# EAGLE board PCB v28 (EAGLE 9.7.0)
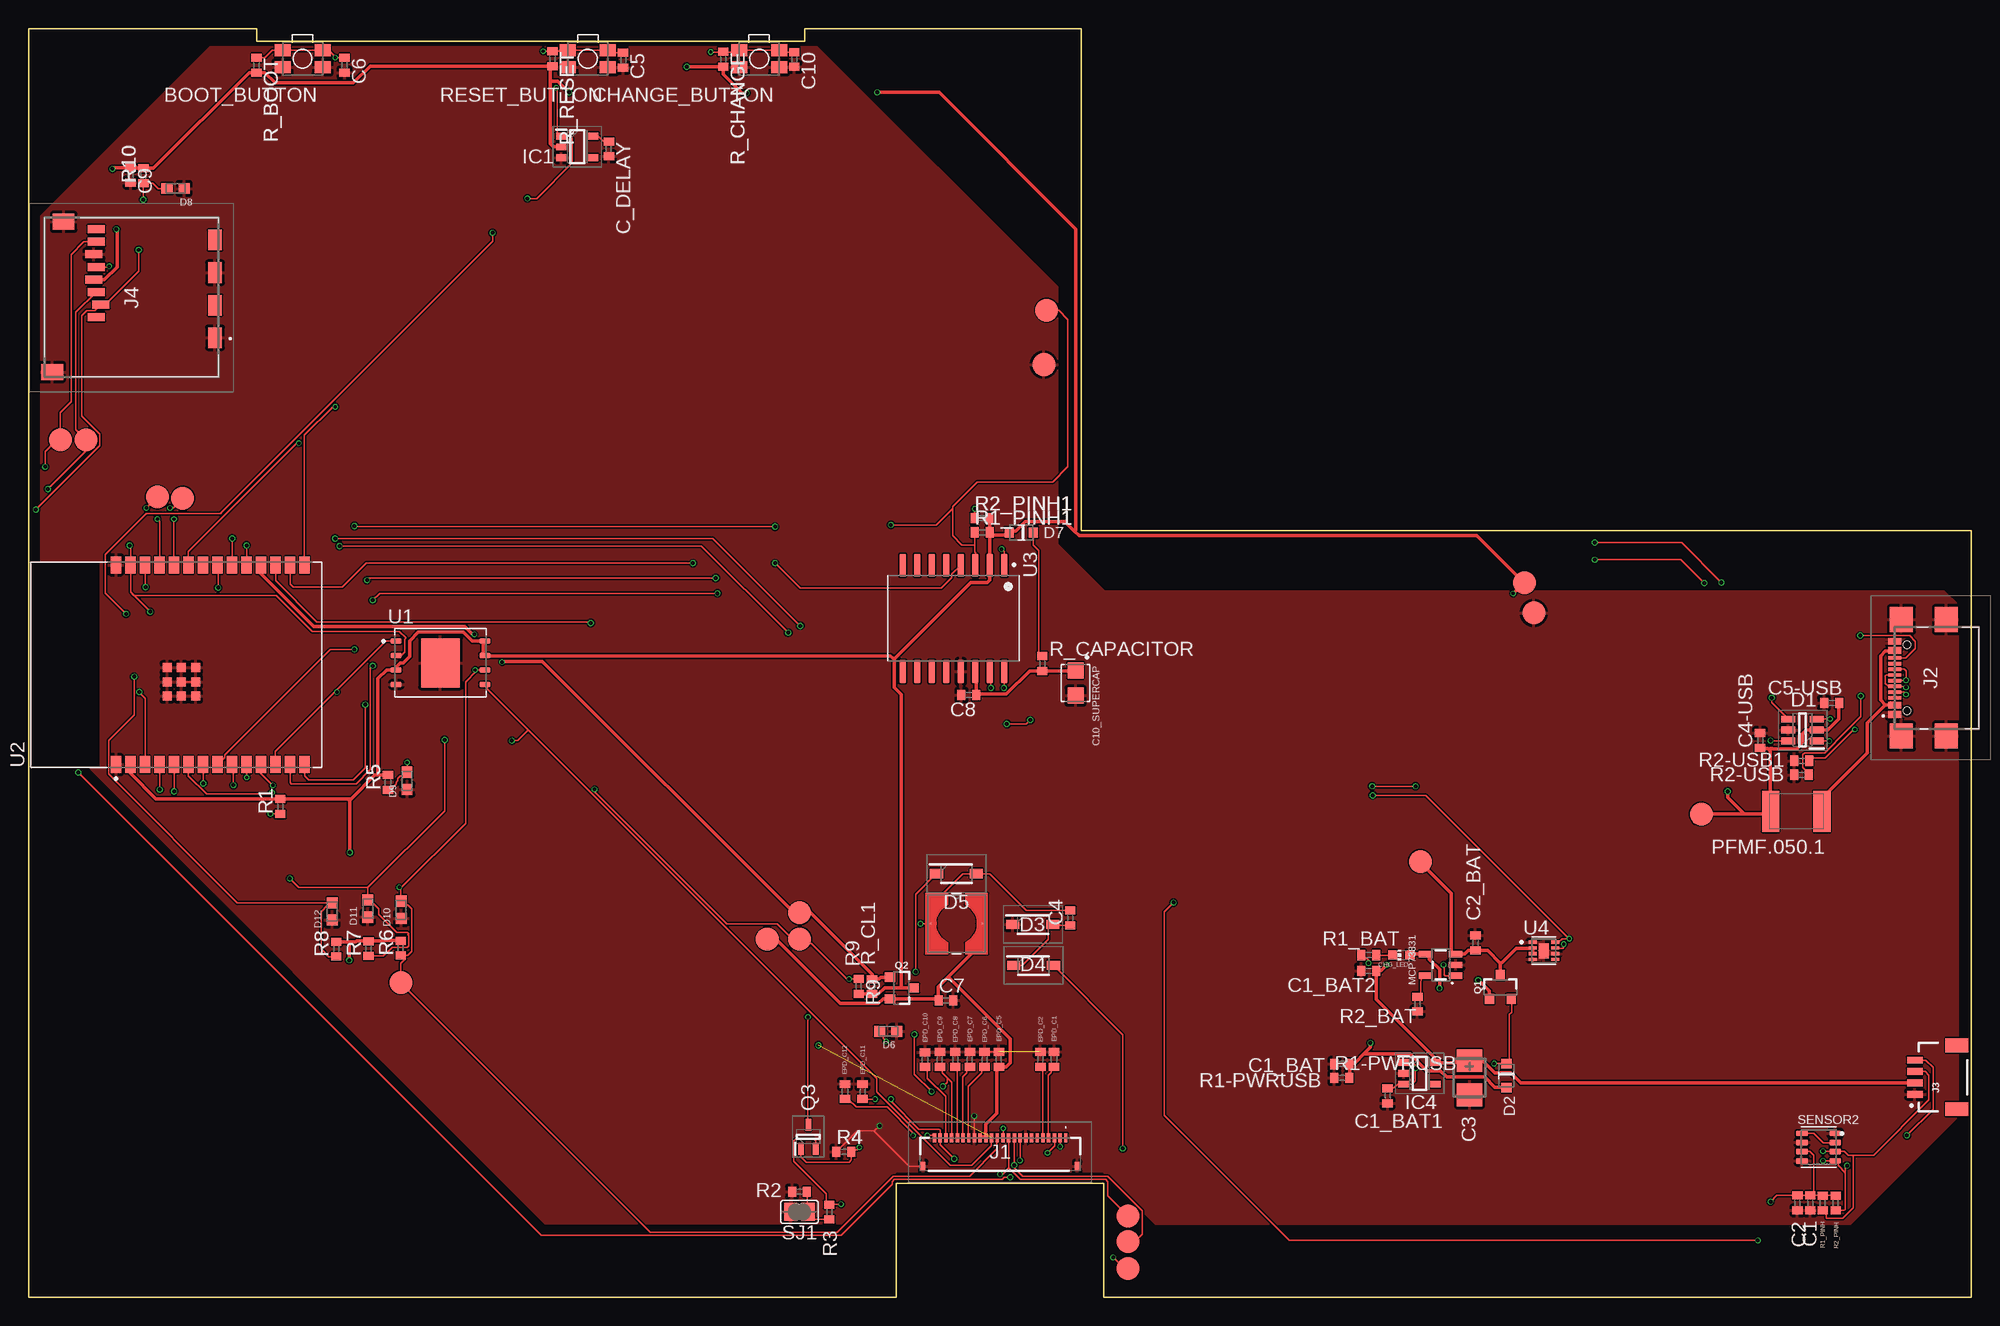
[diagram p0: board, top side]
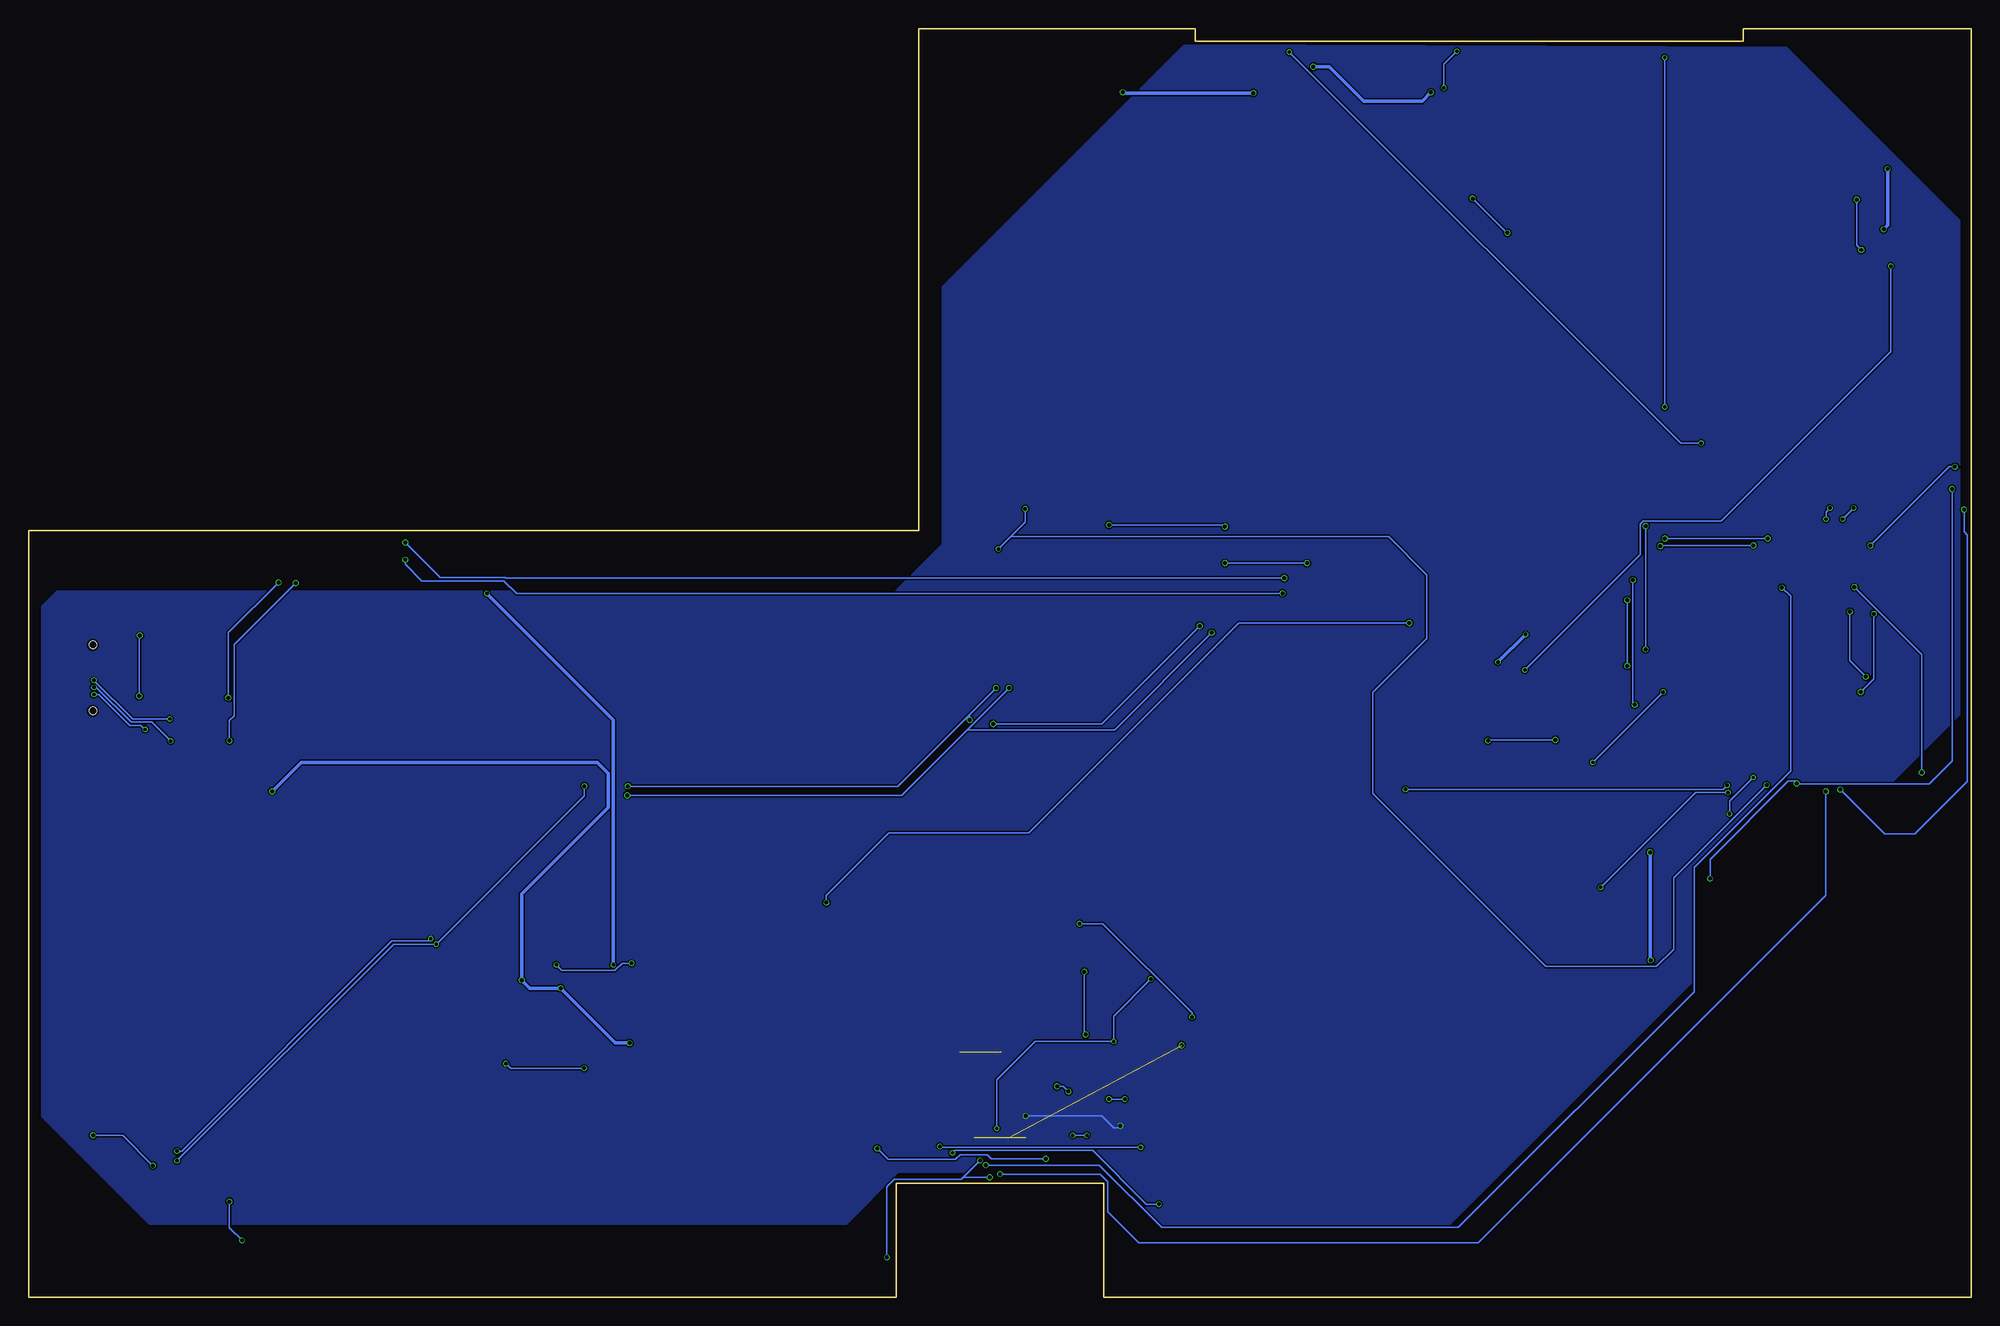
[diagram p1: board, bottom side, seen from below]

Size 170.2 x 111.2 mm. Coordinates in mm from the lower left corner, seen from the top.
Outline: 0,0 0,111.2 20,111.2 20,110.1 68,110.1 68,111.2 92.2,111.2 92.2,67.2 170.2,67.2 170.2,0 94.2,0 94.2,10 76,10 76,0 0,0
Copper layers (1*16): Top 0.035mm / dielectric 1.6mm / Bottom 0.035mm
Design rules "jlcpcb-2layers.dru *": minimum track width 0.15mm, minimum drill 0.3mm, track to track 5mil, track to pad 5mil, pad to pad 5mil, via to via 5mil, smd to smd 5mil, copper to edge 0.2mm, drill to drill 6mil, minimum pad ring 10mil, minimum via ring 3mil, stop-mask expansion 4mil, vias tented up to drill 0mil, thermal gap 10mil
Net classes: 1 Power lines: width 0.3 mm

## Footprints (pad centres in the part's own frame; a part is rotated, then mirrored left to right if it is on the bottom)
MYBUTTON = smd 1.4 x 1.05: 1 1.75,0.75; 2 -1.75,0.75; 3 -1.75,-0.75; 4 1.75,-0.75
EAGLE-LTSPICE_C0402 = smd 0.7 x 0.9: 1 -0.65,0; 2 0.65,0
ESP32_WROVER_EAGLE-LTSPICE_C0402 = smd 0.7 x 0.9: 1 -0.65,0; 2 0.65,0
RCL_CT3528 = smd 2 x 2.2: + -1.5,0; - 1.5,0
CAPCP3225X100N = smd 1.4 x 1.4: 1 -1.1,0; 2 1.1,0
ADAFRUIT_CHIP-LED0603 = smd 0.8 x 0.8: A 0,-0.75; C 0,0.75
SOT95P280X145-6N = smd 1.2 x 0.6: 1 -1.25,0.95; 2 -1.25,0; 3 -1.25,-0.95; 4 1.25,-0.95; 5 1.25,0; 6 1.25,0.95
ESP32_WROVER_AVX---SD0805S020S1R0_AVX_SD0805S020S1R0_0 = smd 0.8 x 0.9: 1 -1.05,0; 2 1.05,0
SOD3716X135N = smd 1.15 x 0.8: 1 -1.75,0; 2 1.75,0
DIOC1608X36N = smd 0.97 x 0.94: 1 -0.75,0; 2 0.75,0
SOT95P280X125-5N = smd 0.9 x 0.6: 1 -1.4,0.95; 2 -1.4,0; 3 -1.4,-0.95; 4 1.4,-0.95; 5 1.4,0.95
SOT95P280X120-5N = smd 0.9 x 0.6: 1 -1.4,0.95; 2 -1.4,0; 3 -1.4,-0.95; 4 1.4,-0.95; 5 1.4,0.95
FH34SRJ24S05SH99 = smd 0.3 x 0.8: 1 5.75,1.45; 2 5.25,1.45; 3 4.75,1.45; 4 4.25,1.45; 5 3.75,1.45; 6 3.25,1.45; 7 2.75,1.45; 8 2.25,1.45; 9 1.75,1.45; 10 1.25,1.45; 11 0.75,1.45; 12 0.25,1.45; 13 -0.25,1.45; 14 -0.75,1.45; 15 -1.25,1.45; 16 -1.75,1.45; 17 -2.25,1.45; 18 -2.75,1.45; 19 -3.25,1.45; 20 -3.75,1.45; 21 -4.25,1.45; 22 -4.75,1.45; 23 -5.25,1.45; 24 -5.75,1.45 | smd 0.4 x 0.8: MP1 6.75,-1.05; MP2 -6.75,-1.05
SAMACSYS_PARTS_USB4110GFA = smd 0.3 x 1.15: A1 -3.35,3.678; A4 -2.55,3.678; A5 -1.25,3.678; A6 -0.25,3.678; A7 0.25,3.678; A8 1.25,3.678; A9 2.55,3.678; A12 3.35,3.678; B1 3.05,3.678; B4 2.25,3.678; B5 1.75,3.678; B6 0.75,3.678; B7 -0.75,3.678; B8 -1.75,3.678; B9 -2.25,3.678; B12 -3.05,3.678 | smd 2.18 x 2: MP1 -5.11,-0.827; MP2 5.11,-0.827; MP3 -5.11,3.103; MP4 5.11,3.103 | hole 0.65: -2.89,2.603; 2.89,2.603
JST04_1MM_RA = smd 0.6 x 1.35: 1 -1.5,0; 2 -0.5,0; 3 0.5,0; 4 1.5,0 | smd 1.2 x 2: NC1 2.8,-3.675; NC2 -2.8,-3.675
112ATAARR03ATTEND = smd 1.8 x 1.2: G1 10.6,10.4; G2 4.9,10.4; S1 7.75,10.4; S2 2.05,10.4 | smd 1.4 x 1.9: G3 13.6,-3.85; G4 0.45,-2.85 | smd 0.7 x 1.5: P1 8.8,0; P2 7.7,0.4; P3 6.6,0; P4 5.5,-0.2; P5 4.4,0; P6 3.3,-0.2; P7 2.2,0; P8 1.1,0
IND_4828-WE-TPC_WRE = smd 0.127 x 0.127: 1 -2.286,0; 2 2.286,0
ESP32_WROVER_SPARKFUN-IC-POWER_SOT23-5 = smd 0.55 x 1.2: 1 -0.95,-1.3; 2 0,-1.3; 3 0.95,-1.3; 4 0.95,1.3; 5 -0.95,1.3
ESP32C6_VARISTOR_CT/CN1812 = smd 1.5 x 3.6: 1 -2.25,0; 2 2.25,0
ESP32_WROVER_SPARKFUN-DISCRETESEMI_SOT23-3 = smd 0.8 x 0.9: 1 -0.95,-1; 2 0.95,-1; 3 0,1.1
SOT65P210X110-3N = smd 1.05 x 0.5: 1 -1.05,0.65; 2 -1.05,-0.65; 3 1.05,0
ESP32_WROVER_EAGLE-LTSPICE_R0402 = smd 0.7 x 0.9: 1 -0.65,0; 2 0.65,0
ESP32_WROVER_BME680_PSON80P300X300X100-8N = smd 1.016 x 0.5: 1 1.458,1.2; 2 1.458,0.4; 3 1.458,-0.4; 4 1.458,-1.2; 5 -1.458,-1.22; 6 -1.458,-0.4; 7 -1.458,0.4; 8 -1.458,1.2
SJ = smd 1.168 x 1.6: 1 -0.762,0; 2 0.762,0
TP20R = smd 2 x 2: TP 0,0
SON127P600X800X80-9N = smd 0.94 x 0.44: 1 -3.895,1.905; 2 -3.895,0.635; 3 -3.895,-0.635; 4 -3.895,-1.905; 5 3.895,-1.905; 6 3.895,-0.635; 7 3.895,0.635; 8 3.895,1.905 | smd 3.4 x 4.3: 9 0,0
XCVR_ESP32-C6-WROOM-1-N8 = smd 1.5 x 0.9: 1 -8.75,5.26; 2 -8.75,3.99; 3 -8.75,2.72; 4 -8.75,1.45; 5 -8.75,0.18; 6 -8.75,-1.09; 7 -8.75,-2.36; 8 -8.75,-3.63; 9 -8.75,-4.9; 10 -8.75,-6.17; 11 -8.75,-7.44; 12 -8.75,-8.71; 13 -8.75,-9.98; 14 -8.75,-11.25; 15 8.75,-11.25; 16 8.75,-9.98; 17 8.75,-8.71; 18 8.75,-7.44; 19 8.75,-6.17; 20 8.75,-4.9; 21 8.75,-3.63; 22 8.75,-2.36; 23 8.75,-1.09; 24 8.75,0.18; 25 8.75,1.45; 26 8.75,2.72; 27 8.75,3.99; 28 8.75,5.26 | smd 0.8 x 0.8: 29_1 -2.755,0.79; 29_2 -1.505,0.79; 29_3 -0.255,0.79; 29_4 -2.755,-0.46; 29_5 -1.505,-0.46; 29_6 -0.255,-0.46; 29_7 -2.755,-1.71; 29_8 -1.505,-1.71; 29_9 -0.255,-1.71
SOIC127P1032X265-16N = smd 2.05 x 0.59: 1 -4.655,4.445; 2 -4.655,3.175; 3 -4.655,1.905; 4 -4.655,0.635; 5 -4.655,-0.635; 6 -4.655,-1.905; 7 -4.655,-3.175; 8 -4.655,-4.445; 9 4.655,-4.445; 10 4.655,-3.175; 11 4.655,-1.905; 12 4.655,-0.635; 13 4.655,0.635; 14 4.655,1.905; 15 4.655,3.175; 16 4.655,4.445
SON50P200X200X80-9N = smd 0.76 x 0.27: 1 -0.985,0.75; 2 -0.985,0.25; 3 -0.985,-0.25; 4 -0.985,-0.75; 5 0.985,-0.75; 6 0.985,-0.25; 7 0.985,0.25; 8 0.985,0.75 | smd 0.9 x 1.3: 9 0,0

## Placement (x,y rotation side)
BOOT_BUTTON  BUTTON_CUSYOMV1  [MYBUTTON]  24,108.55 180 top
C1  100nF  [EAGLE-LTSPICE_C0402]  156.07,8.29 270 top
C1_BAT  4.7uF  [EAGLE-LTSPICE_C0402]  115.04,20.46 180 top
C1_BAT1  4.7uF  [ESP32_WROVER_EAGLE-LTSPICE_C0402]  119.05,17.68 270 top
C1_BAT2  4.7uF  [ESP32_WROVER_EAGLE-LTSPICE_C0402]  117.39,28.63 180 top
C2  100nF  [EAGLE-LTSPICE_C0402]  154.95,8.29 270 top
C2_BAT  4.7uF  [EAGLE-LTSPICE_C0402]  126.75,31.06 90 top
C3  100uF TANT  [RCL_CT3528]  126.23,19.26 270 top
C4  4.7uF/25V  [EAGLE-LTSPICE_C0402]  91.26,33.25 90 top
C4-USB  100nF  [ESP32_WROVER_EAGLE-LTSPICE_C0402]  151.68,48.81 90 top
C5  1uF  [EAGLE-LTSPICE_C0402]  52.08,108.42 270 top
C5-USB  4.7uF  [ESP32_WROVER_EAGLE-LTSPICE_C0402]  157.95,52.09 180 top
C6  100nF  [EAGLE-LTSPICE_C0402]  27.68,107.99 270 top
C7  10uF  [EAGLE-LTSPICE_C0402]  80.37,26.04 0 top
C8  100nF  [EAGLE-LTSPICE_C0402]  82.36,52.79 180 top
C9  100nF  [EAGLE-LTSPICE_C0402]  8.94,98.34 270 top
C10  100nF  [EAGLE-LTSPICE_C0402]  67.07,108.49 270 top
C10_SUPERCAP  CPH3225A  [CAPCP3225X100N]  91.73,53.85 270 top
C_DELAY  100nF  [EAGLE-LTSPICE_C0402]  50.84,100.65 270 top
CHANGE_BUTTON  BUTTON_CUSYOMV1  [MYBUTTON]  64,108.55 180 top
CHG_LED  [ADAFRUIT_CHIP-LED0603]  120.26,30.01 90 top
D1  USBLC6-2SC6Y  [SOT95P280X145-6N]  155.4,49.73 180 top
D2  ESP32_WROVER_AVX---SD0805S020S1R0_AVX_SD0805S020S1R0_0_0AVX_SD0805S020S1R0_0_0  [ESP32_WROVER_AVX---SD0805S020S1R0_AVX_SD0805S020S1R0_0]  129.46,19.44 270 top
D3  MBR0530  [SOD3716X135N]  87.98,32.68 0 top
D4  MBR0530  [SOD3716X135N]  88.04,29.09 0 top
D5  MBR0530  [SOD3716X135N]  81.28,37.14 0 top
D6  PGB1010603MR  [DIOC1608X36N]  75.3,23.33 180 top
D7  ESP32_WROVER_AVX---SD0805S020S1R0_AVX_SD0805S020S1R0_0_0AVX_SD0805S020S1R0_0_0  [ESP32_WROVER_AVX---SD0805S020S1R0_AVX_SD0805S020S1R0_0]  86.96,67.04 180 top
D8  PGB1010603MR  [DIOC1608X36N]  12.88,97.18 180 top
D9  PGB1010603MR  [DIOC1608X36N]  33.16,45.28 90 top
D10  PGB1010603MR  [DIOC1608X36N]  32.64,33.98 90 top
D11  PGB1010603MR  [DIOC1608X36N]  29.72,34.08 90 top
D12  PGB1010603MR  [DIOC1608X36N]  26.6,33.83 90 top
EPD_C1  1uF/50V  [EAGLE-LTSPICE_C0402]  89.83,20.88 90 top
EPD_C2  1uF/50V  [EAGLE-LTSPICE_C0402]  88.64,20.88 90 top
EPD_C5  1uF/50V  [EAGLE-LTSPICE_C0402]  85,20.88 90 top
EPD_C6  1uF/50V  [EAGLE-LTSPICE_C0402]  83.75,20.86 90 top
EPD_C7  1uF/50V  [EAGLE-LTSPICE_C0402]  82.46,20.86 90 top
EPD_C8  1uF/50V  [EAGLE-LTSPICE_C0402]  81.17,20.86 90 top
EPD_C9  1uF/50V  [EAGLE-LTSPICE_C0402]  79.83,20.86 90 top
EPD_C10  1uF/50V  [EAGLE-LTSPICE_C0402]  78.53,20.85 90 top
EPD_C11  1uF/50V  [EAGLE-LTSPICE_C0402]  73.06,18.05 90 top
EPD_C12  1uF/50V  [EAGLE-LTSPICE_C0402]  71.52,18.05 90 top
IC1  BD5229G-TR  [SOT95P280X125-5N]  48.07,100.83 0 top
IC4  XC6220A331MR-G  [SOT95P280X120-5N]  121.85,19.65 0 top
J1  FH34SRJ-24S-0.5SH_99_  [FH34SRJ24S05SH99]  85.11,12.55 0 top
J2  SAMACSYS_PARTS_USB4110-GF-A  [SAMACSYS_PARTS_USB4110GFA]  167.16,54.3 90 top
J3  QWIIC_RIGHT_ANGLE  [JST04_1MM_RA]  165.25,19.3 90 top
J4  112A-TAAR-R03_ATTEND  [112ATAARR03ATTEND]  5.93,94.71 270 top
L1  68uH  [IND_4828-WE-TPC_WRE]  81.29,32.76 0 top
MCP73831  ESP32_WROVER_SPARKFUN-IC-POWER_MCP73831  [ESP32_WROVER_SPARKFUN-IC-POWER_SOT23-5]  123.7,29.15 90 top
PFMF.050.1  ESP32C6_VARISTORCN1812  [ESP32C6_VARISTOR_CT/CN1812]  154.86,42.61 180 top
Q1  20V/4.2A/52mΩ/1.4W  [ESP32_WROVER_SPARKFUN-DISCRETESEMI_SOT23-3]  128.93,27.17 0 top
Q2  20V/4.2A/52mΩ/1.4W  [ESP32_WROVER_SPARKFUN-DISCRETESEMI_SOT23-3]  76.45,27.12 270 top
Q3  SI1308EDL-T1-GE3  [SOT65P210X110-3N]  68.31,14.09 90 top
R1  10k  [ESP32_WROVER_EAGLE-LTSPICE_R0402]  22.05,43.02 90 top
R1-PWRUSB  100k  [ESP32_WROVER_EAGLE-LTSPICE_R0402]  115.04,19.25 0 top
R1_BAT  200  [ESP32_WROVER_EAGLE-LTSPICE_R0402]  117.41,30.01 180 top
R1_PINH  10k  [ESP32_WROVER_EAGLE-LTSPICE_R0402]  157.18,8.28 270 top
R1_PINH1  10k  [ESP32_WROVER_EAGLE-LTSPICE_R0402]  83.53,67.05 0 top
R2  2.2  [ESP32_WROVER_EAGLE-LTSPICE_R0402]  67.54,9.27 0 top
R2-USB  5k1  [ESP32_WROVER_EAGLE-LTSPICE_R0402]  155.31,45.8 180 top
R2-USB1  5k1  [ESP32_WROVER_EAGLE-LTSPICE_R0402]  155.32,47.03 0 top
R2_BAT  2k  [ESP32_WROVER_EAGLE-LTSPICE_R0402]  121.67,25.71 90 top
R2_PINH  10k  [ESP32_WROVER_EAGLE-LTSPICE_R0402]  158.31,8.28 270 top
R2_PINH1  10k  [ESP32_WROVER_EAGLE-LTSPICE_R0402]  83.52,68.3 0 top
R3  0.47  [ESP32_WROVER_EAGLE-LTSPICE_R0402]  70.14,7.49 90 top
R4  10k  [ESP32_WROVER_EAGLE-LTSPICE_R0402]  71.42,12.77 0 top
R5  10k  [ESP32_WROVER_EAGLE-LTSPICE_R0402]  31.49,45.12 90 top
R6  10k  [ESP32_WROVER_EAGLE-LTSPICE_R0402]  32.61,30.62 90 top
R7  10k  [ESP32_WROVER_EAGLE-LTSPICE_R0402]  29.78,30.57 90 top
R8  10k  [ESP32_WROVER_EAGLE-LTSPICE_R0402]  26.95,30.52 90 top
R9  10k  [ESP32_WROVER_EAGLE-LTSPICE_R0402]  72.72,27.27 270 top
R10  10k  [ESP32_WROVER_EAGLE-LTSPICE_R0402]  10.06,98.32 90 top
R_BOOT  10k  [ESP32_WROVER_EAGLE-LTSPICE_R0402]  19.97,107.98 270 top
R_CAPACITOR  15  [ESP32_WROVER_EAGLE-LTSPICE_R0402]  88.79,55.55 270 top
R_CHANGE  10k  [ESP32_WROVER_EAGLE-LTSPICE_R0402]  60.86,108.5 270 top
R_CL1  10k  [ESP32_WROVER_EAGLE-LTSPICE_R0402]  73.89,27.24 270 top
R_RESET  10k  [ESP32_WROVER_EAGLE-LTSPICE_R0402]  45.9,108.55 270 top
RESET_BUTTON  BUTTON_CUSYOMV1  [MYBUTTON]  49,108.55 180 top
SENSOR2  ESP32_WROVER_BME680_BME680  [ESP32_WROVER_BME680_PSON80P300X300X100-8N]  156.81,13.18 0 top
SJ1  [SJ]  67.53,7.5 0 top
TP1  TPTP20R  [TP20R]  11.28,70.15 0 top
TP2  TPTP20R  [TP20R]  13.5,70.05 0 top
TP3  TPTP20R  [TP20R]  121.93,38.2 0 top
TP4  TPTP20R  [TP20R]  88.94,81.75 0 top
TP5  TPTP20R  [TP20R]  131.86,60 0 top
TP6  TPTP20R  [TP20R]  2.78,75.17 0 top
TP7  TPTP20R  [TP20R]  5.05,75.15 0 top
TP8  TPTP20R  [TP20R]  32.62,27.6 0 top
TP9  TPTP20R  [TP20R]  96.3,2.54 0 top
TP10  TPTP20R  [TP20R]  67.54,31.42 0 top
TP11  TPTP20R  [TP20R]  96.31,7.15 0 top
TP12  TPTP20R  [TP20R]  96.29,4.92 0 top
TP13  TPTP20R  [TP20R]  67.54,33.72 0 top
TP14  TPTP20R  [TP20R]  146.54,42.37 0 top
TP15  TPTP20R  [TP20R]  89.19,86.52 0 top
TP16  TPTP20R  [TP20R]  131.06,62.65 0 top
TP17  TPTP20R  [TP20R]  64.71,31.4 0 top
U1  W25Q512JVEIQ  [SON127P600X800X80-9N]  36.09,55.61 0 top
U2  ESP32-C6-WROOM-1-N8  [XCVR_ESP32-C6-WROOM-1-N8]  12.93,55.45 90 top
U3  DS3231SN#  [SOIC127P1032X265-16N]  81.02,59.51 270 top
U4  MAX17048G+T10  [SON50P200X200X80-9N]  132.74,30.38 0 top

## Library data of the parts
BOOT_BUTTON CHANGE_BUTTON CHG_LED PFMF.050.1 RESET_BUTTON SJ1 TP1-TP17 = DeskAssistant v19 v1
C1 C1_BAT C1_BAT1 C1_BAT2 C2 C2_BAT C4 C4-USB C5 C5-USB C6-C10 C_DELAY EPD_C1 EPD_C2 EPD_C5-EPD_C12 = DeskAssistant v19 v1; SPICEMODEL: NONE; SPICEPREFIX: C
C3 = DeskAssistant v19 v1; SPICEPREFIX: C
C10_SUPERCAP = DeskAssistant v19 v1; AVAILABILITY: Not in stock; CHECK_PRICES: https://www.snapeda.com/parts/CPH3225A/Seiko+Instruments/view-part/?ref=eda; DESCRIPTION: 11 mF (EDLC) Supercapacitor 3.3 V 1210 (3225 Metric) - -; MF: Seiko Instruments; MP: CPH3225A; PACKAGE: 1210 Seiko; PRICE: None; PURCHASE-URL: https://www.snapeda.com/api/url_track_click_mouser/?unipart_id=562593&manufacturer=Seiko Instruments&part_name=CPH3225A&search_term=None; SNAPEDA_LINK: https://www.snapeda.com/parts/CPH3225A/Seiko+Instruments/view-part/?ref=snap
D1 = DeskAssistant v19 v1; AVAILABILITY: In Stock; CHECK_PRICES: https://www.snapeda.com/parts/USBLC6-2SC6Y/STMicroelectronics/view-part/?ref=eda; DESCRIPTION: 17V Clamp 5A (8/20µs) Ipp Tvs Diode Surface Mount SOT-23-6; MF: STMicroelectronics; MP: USBLC6-2SC6Y; PACKAGE: SOT-23-6 STMicroelectronics; PRICE: None; SNAPEDA_LINK: https://www.snapeda.com/parts/USBLC6-2SC6Y/STMicroelectronics/view-part/?ref=snap
D2 D7 = DeskAssistant v19 v1; CENTROID_NOT_SPECIFIED: No; DATASHEET: http://datasheets.avx.com/schottky.pdf; DIGIKEY_DESCRIPTION: DIODE SCHOTTKY 20V 1A 0805; DIGIKEY_PART_NUMBER: 478-7800-1-ND; LEAD_FREE: yes; MF: AVX; MOUSER_PART_NUMBER: 581-SD0805S020S1R0; PACKAGE: 0805 (2012 metric); PREFIX: D; ROHS: yes; TEMPERATURE_RANGE_HIGH: +125°C; TEMPERATURE_RANGE_LOW: -55°C
D3-D5 = DeskAssistant v19 v1; AVAILABILITY: In Stock; CHECK_PRICES: https://www.snapeda.com/parts/MBR0530/Onsemi/view-part/?ref=eda; DESCRIPTION: Diode Schottky 30 V 500mA Surface Mount SOD-123; MF: ON Semiconductor; MP: MBR0530; PACKAGE: SOD-123-2 ON Semiconductor; PRICE: None; PURCHASE-URL: https://www.snapeda.com/api/url_track_click_mouser/?unipart_id=179458&manufacturer=ON Semiconductor&part_name=MBR0530&search_term=None; SNAPEDA_LINK: https://www.snapeda.com/parts/MBR0530/Onsemi/view-part/?ref=snap
D6 D8-D12 = DeskAssistant v19 v1; AVAILABILITY: In Stock; CHECK_PRICES: https://www.snapeda.com/parts/PGB1010603MR/Littelfuse/view-part/?ref=eda; DESCRIPTION: 150V (Typ) Clamp - Ipp Tvs Diode Surface Mount 0603 (1608 Metric); MF: Littelfuse Inc.; MP: PGB1010603MR; PACKAGE: 0603 Littelfuse Inc.; PRICE: None; PURCHASE-URL: https://www.snapeda.com/api/url_track_click_mouser/?unipart_id=5659453&manufacturer=Littelfuse Inc.&part_name=PGB1010603MR&search_term=None; SNAPEDA_LINK: https://www.snapeda.com/parts/PGB1010603MR/Littelfuse/view-part/?ref=snap
IC1 = DeskAssistant v19 v1; DESCRIPTION: Voltage Detector with Adjustable Delay Time: CMOS processes are utilized to develop high precision, low current consumption CMOS reset ICs that allow arbitrary setting of the delay time. The extensive lineup includes both Nch Open Drain and CMOS output types in a wide range of detection voltages (from 2.3V to 6.0V, in 0.1V steps), enabling selection of the ideal solution based on customer requirements. In addition, the entire series is of course both lead-free and RoHS-compliant.; HEIGHT: 1.25mm; MANUFACTURER_NAME: ROHM Semiconductor; MANUFACTURER_PART_NUMBER: BD5229G-TR; MOUSER_PART_NUMBER: 755-BD5229G-TR; MOUSER_PRICE-STOCK: https://www.mouser.co.uk/ProductDetail/ROHM-Semiconductor/BD5229G-TR?qs=4kLU8WoGk0vvnhrrYwdszw%3D%3D
IC4 = DeskAssistant v19 v1; DESCRIPTION: LDO Voltage Regulators; HEIGHT: 1.2mm; MANUFACTURER_NAME: Torex; MANUFACTURER_PART_NUMBER: XC6220A331MR-G; MOUSER_PART_NUMBER: 865-XC6220A331MR-G; MOUSER_PRICE-STOCK: https://www.mouser.co.uk/ProductDetail/Torex-Semiconductor/XC6220A331MR-G?qs=AsjdqWjXhJ8ZSWznL1J0gg%3D%3D
J1 = DeskAssistant v19 v1; DESCRIPTION: 24 Position FFC, FPC Connector Contacts, Top and Bottom 0.020" (0.50mm) Surface Mount, Right Angle; HEIGHT: 1.1mm; MANUFACTURER_NAME: Hirose; MANUFACTURER_PART_NUMBER: FH34SRJ-24S-0.5SH(99); MOUSER_PART_NUMBER: 798-FH34SRJ24S05SH99; MOUSER_PRICE-STOCK: https://www.mouser.co.uk/ProductDetail/Hirose-Connector/FH34SRJ-24S-0.5SH99?qs=vcbW%252B4%252BSTIpKBl5ap9J8Fw%3D%3D
J2 = DeskAssistant v19 v1; DESCRIPTION: CONN USB 2.0 TYPE-C R/A SMT; HEIGHT: 3.26mm; MANUFACTURER_NAME: GCT (GLOBAL CONNECTOR TECHNOLOGY); MANUFACTURER_PART_NUMBER: USB4110-GF-A; MOUSER_PART_NUMBER: 640-USB4110-GF-A; MOUSER_PRICE-STOCK: https://www.mouser.co.uk/ProductDetail/GCT/USB4110-GF-A?qs=KUoIvG%2F9IlYiZvIXQjyJeA%3D%3D
J3 = DeskAssistant v19 v1; PROD_ID: CONN-13694
J4 = DeskAssistant v19 v1; DESCRIPTION: Micro SD Card Socket, Push-Push Type, Top Mount, SMT, H=1.83mm, 10u; HEIGHT: 1.9mm; MANUFACTURER_NAME: ATTEND; MANUFACTURER_PART_NUMBER: 112A-TAAR-R03 ATTEND
L1 = DeskAssistant v19 v1; COPYRIGHT: Copyright (C) 2024 Ultra Librarian. All rights reserved.; MANUFACTURER_PART_NUMBER: 744043680; MFR_NAME: Wurth Electronics
MCP73831 = DeskAssistant v19 v1; PROD_ID: IC-09995
Q1 Q2 = DeskAssistant v19 v1; PROD_ID: TRAN-14388
Q3 = DeskAssistant v19 v1; AVAILABILITY: In Stock; CHECK_PRICES: https://www.snapeda.com/parts/SI1308EDL-T1-GE3/Vishay+Siliconix/view-part/?ref=eda; DESCRIPTION: Si1308EDL-T1-GE3 N-channel MOSFET Transistor, 1.5 A, 30 V, 3-Pin SC-70 | Siliconix / Vishay SI1308EDL-T1-GE3; MF: Vishay Siliconix; MP: SI1308EDL-T1-GE3; PACKAGE: SOT-323 Vishay Semiconductor; PRICE: None; PURCHASE-URL: https://www.snapeda.com/api/url_track_click_mouser/?unipart_id=274603&manufacturer=Vishay Siliconix&part_name=SI1308EDL-T1-GE3&search_term=None; SNAPEDA_LINK: https://www.snapeda.com/parts/SI1308EDL-T1-GE3/Vishay+Siliconix/view-part/?ref=snap
R1 R1-PWRUSB R1_BAT R1_PINH R1_PINH1 R2 R2-USB R2-USB1 R2_BAT R2_PINH R2_PINH1 R3-R10 R_BOOT R_CAPACITOR R_CHANGE R_CL1 R_RESET = DeskAssistant v19 v1; SPICEMODEL: NONE; SPICEPREFIX: R
SENSOR2 = DeskAssistant v19 v1; AVAILABILITY: Unavailable; DESCRIPTION: Integrated Environmental Unit; MF: Bosch Sensortec; MP: BME680; PACKAGE: LGA-8 Bosch Tools; PRICE: None
U1 = DeskAssistant v19 v1; AVAILABILITY: In Stock; CHECK_PRICES: https://www.snapeda.com/parts/W25Q512JVEIQ/Winbond+Electronics/view-part/?ref=eda; DESCRIPTION: FLASH - NOR Memory IC 512Mb (64M x 8) SPI - Quad I/O 133 MHz 8-WSON (8x6); MF: Winbond Electronics; MP: W25Q512JVEIQ; PACKAGE: Package; PRICE: None; SNAPEDA_LINK: https://www.snapeda.com/parts/W25Q512JVEIQ/Winbond+Electronics/view-part/?ref=snap
U2 = DeskAssistant v19 v1; AVAILABILITY: In Stock; CHECK_PRICES: https://www.snapeda.com/parts/ESP32-C6-WROOM-1-N8/Espressif+Systems/view-part/?ref=eda; DESCRIPTION: Multiprotocol Modules ESP32-C6 module, Wi-Fi 6 in 2.4 GHz band, Bluetooth 5, Zigbee 3.0 and Thread. ESP34-WROOM Compatible - ENGINEERING SAMPLE; MF: Espressif Systems; MP: ESP32-C6-WROOM-1-N8; PACKAGE: None; PRICE: None; SNAPEDA_LINK: https://www.snapeda.com/parts/ESP32-C6-WROOM-1-N8/Espressif+Systems/view-part/?ref=snap
U3 = DeskAssistant v19 v1; AVAILABILITY: In Stock; CHECK_PRICES: https://www.snapeda.com/parts/DS3231SN%23/Analog+Devices/view-part/?ref=eda; DESCRIPTION: Extremely Accurate I²C-Integrated RTC/TCXO/Crystal; MF: Analog Devices; MP: DS3231SN#; PACKAGE: SOIC-16 Maxim; PRICE: None; PURCHASE-URL: https://www.snapeda.com/api/url_track_click_mouser/?unipart_id=99048&manufacturer=Analog Devices&part_name=DS3231SN#&search_term=None; SNAPEDA_LINK: https://www.snapeda.com/parts/DS3231SN%23/Analog+Devices/view-part/?ref=snap
U4 = DeskAssistant v19 v1; AVAILABILITY: In Stock; CHECK_PRICES: https://www.snapeda.com/parts/MAX17048G+T10/Analog+Devices/view-part/?ref=eda; DESCRIPTION: 3µA 1-Cell/2-Cell Fuel Gauge with ModelGauge; MF: Analog Devices; MP: MAX17048G+T10; PACKAGE: TDFN-8 Maxim; PRICE: None; PURCHASE-URL: https://www.snapeda.com/api/url_track_click_mouser/?unipart_id=329239&manufacturer=Analog Devices&part_name=MAX17048G+T10&search_term=None; SNAPEDA_LINK: https://www.snapeda.com/parts/MAX17048G+T10/Analog+Devices/view-part/?ref=snap

## Nets
3V3 [Power lines]: C1_BAT2.1 C3.+ C9.1 D7.2 IC1.2 IC4.5 J3.2 J4.P4 Q2.3 R1.2 R1_PINH1.2 R2_PINH1.2 R5.2 R6.2 R7.2 R8.2 R9.2 R10.2 R_BOOT.2 R_CHANGE.2 R_CL1.2 R_RESET.2 TP16.TP U1.3 U1.7 U1.8 U2.2 U3.2
32KHZ: R2_PINH1.1 U2.9 U3.1
DN: D1.1 J2.A7 J2.B7
DP: D1.3 J2.A6 J2.B6
EPD_3V3 [Power lines]: C7.1 EPD_C5.1 J1.15 J1.16 L1.2 Q2.2 TP17.TP
EPD_3V3_C [Power lines]: Q2.1 R_CL1.1 TP13.TP U2.18
EPD_BUSY: J1.9 TP9.TP U2.26
EPD_CS: D6.2 J1.12 R9.1 TP10.TP U2.11
EPD_DC: J1.11 TP11.TP U2.5
EPD_RST: J1.10 TP12.TP U2.21
FLASH_CS: D9.2 R5.1 U1.1 U2.12
GDR: J1.2 Q3.1 R4.2
GND: BOOT_BUTTON.1 BOOT_BUTTON.2 C1.2 C1_BAT1.2 C1_BAT2.2 C1_BAT.2 C2.2 C2_BAT.2 C3.- C4-USB.2 C5-USB.2 C5.2 C6.2 C7.2 C8.2 C9.2 C10.2 C10_SUPERCAP.2 C_DELAY.2 CHANGE_BUTTON.1 CHANGE_BUTTON.2 D1.5 D3.1 D6.1 D8.1 D9.1 D10.1 D11.1 D12.1 EPD_C1.2 EPD_C2.2 EPD_C5.2 EPD_C6.2 EPD_C7.2 EPD_C8.2 EPD_C9.2 EPD_C10.2 EPD_C11.2 EPD_C12.2 IC1.3 IC4.2 J1.8 J1.17 J1.MP1 J1.MP2 J2.A1 J2.A12 J2.B1 J2.B12 J2.MP1 J2.MP2 J2.MP3 J2.MP4 J3.1 J4.G1 J4.G2 J4.G3 J4.G4 J4.P6 MCP73831.2 R1-PWRUSB.1 R2-USB1.1 R2-USB.2 R2.1 R2_BAT.1 R4.1 RESET_BUTTON.1 RESET_BUTTON.2 SENSOR2.1 SENSOR2.5 SENSOR2.7 SJ1.1 TP4.TP TP5.TP U1.4 U1.9 U2.1 U2.28 U2.29_1 U2.29_2 U2.29_3 U2.29_4 U2.29_5 U2.29_6 U2.29_7 U2.29_8 U2.29_9 U3.13 U4.1 U4.4 U4.6 U4.9
GPIO8: R1.1 U2.10
I2C_PW: C1.1 C2.1 R1_PINH.1 R2_PINH.1 SENSOR2.6 U2.17
INT_RTC: R1_PINH1.1 TP15.TP U2.8 U3.3
IO/BOOT: BOOT_BUTTON.3 BOOT_BUTTON.4 C6.1 R_BOOT.1 U2.15
IO/CHANGE: C10.1 CHANGE_BUTTON.3 CHANGE_BUTTON.4 R_CHANGE.1 U2.23
MISO: D12.2 J4.P7 R8.1 TP6.TP U1.2 U2.27
MOSI: D11.2 J1.14 J4.P3 R7.1 TP7.TP U1.5 U2.7
N$1: J2.A5 R2-USB1.2
N$2: J2.B5 R2-USB.1
N$3: SENSOR2.2 SENSOR2.8
N$4: EPD_C6.1 J1.18
N$5: C1_BAT1.1 D2.1 IC4.1 IC4.3 Q1.2
N$6: EPD_C7.1 J1.19
N$7: EPD_C8.1 J1.20
N$8: C4.1 D3.2 D4.1
N$10: EPD_C10.1 J1.22
N$12: EPD_C12.1 J1.24
N$14: C_DELAY.1 IC1.5
N$16: MCP73831.1 R1_BAT.2
N$17: CHG_LED.C R1_BAT.1
N$18: MCP73831.5 R2_BAT.2
N$21: D7.1 R_CAPACITOR.1
N$22: EPD_C1.1 J1.4
N$23: EPD_C2.1 J1.5
PREVGH: D5.1 EPD_C9.1 J1.21
PREVGL: D4.2 EPD_C11.1 J1.23
RESE: J1.3 Q3.2 R3.2
RESE': R2.2 R3.1 SJ1.2
RESET: C5.1 IC1.1 R_RESET.1 RESET_BUTTON.3 RESET_BUTTON.4 U2.3
RTC_RST: U2.16 U3.4
RX: TP2.TP U2.24
SCK: D10.2 J1.13 J4.P5 R6.1 TP8.TP U1.6 U2.6
SCL: J3.4 R2_PINH.2 SENSOR2.4 U2.20 U3.16 U4.7
SDA: J3.3 R1_PINH.2 SENSOR2.3 U2.19 U3.15 U4.8
SRC: C4.2 D5.2 L1.1 Q3.3
SS_SD: D8.2 J4.P2 R10.1 U2.4
TX: TP1.TP U2.25
USB_D+: D1.4 U2.14
USB_D-: D1.6 U2.13
VBAT [Power lines]: C2_BAT.1 MCP73831.3 Q1.3 TP3.TP U4.2 U4.3
VBUS [Power lines]: C1_BAT.1 C4-USB.1 C5-USB.1 CHG_LED.A D1.2 D2.2 MCP73831.4 PFMF.050.1.2 Q1.1 R1-PWRUSB.2 TP14.TP
VRTC [Power lines]: C8.1 C10_SUPERCAP.1 R_CAPACITOR.2 U3.14
VUSB [Power lines]: J2.A4 J2.A9 J2.B4 J2.B9 PFMF.050.1.1

## Tracks (layer width: path | path; a pad name or v marks a point on that pad's centre or on a via)
3V3  (via drill 0.3, 0.35)
  Top 0.3: IC1.2 45.98,100.83 45.7,101.11 45.7,106.6 | 45.7,106.6 45.7,107.89 45.84,107.89 R_RESET.2 45.57,107.89 29.92,107.89 28.46,106.44 21.61,106.44 20.71,107.34 20.08,107.34 R_BOOT.2 19.94,107.34 19.32,107.34 10.94,98.96 10.18,98.96 R10.2 10.04,98.96 9.49,98.96 9.42,99.03 9,99.03 C9.1 | 60.8,107.82 R_CHANGE.2 | J4.P4 5.75,89.19 6.65,89.19 7.76,90.3 7.76,93.54 v7.7,93.6 | 8.86,99.03 C9.1 | 28.15,31.16 28.67,31.16 28.74,31.23 29.78,31.23 R7.2 29.92,31.23 30.89,31.23 30.95,31.3 32.55,31.3 R6.2 | 28.15,31.16 27.01,31.16 R8.2 | 27.95,43.7 28.25,43.7 30.33,45.77 30.61,45.77 | 27.95,43.7 22.09,43.7 R1.2 21.95,43.7 11.15,43.7 8.93,45.91 8.93,46.67 U2.2 | 30.61,45.77 31.44,45.77 R5.2 | 30.61,45.77 30.61,54.22 31.37,54.98 32.13,54.98 U1.3 32.06,55.12 32.55,55.61 32.83,55.61 33.38,56.16 33.38,57.55 34.14,58.31 38.09,58.31 38.85,57.55 39.68,57.55 U1.8 39.96,57.55 39.82,57.55 39.82,56.51 39.68,56.37 39.68,56.23 39.96,56.23 U1.7 40.1,56.23 75.48,56.23 75.69,56.02 75.83,55.95 | R9.2 72.78,26.59 R_CL1.2 74.03,26.59 74.44,26.59 75,27.15 76.45,27.15 | 76.45,27.15 77.49,27.15 Q2.3 | R1_PINH1.2 84.21,67.1 84.21,67.8 84.14,67.86 84.14,68.28 R2_PINH1.2 | R1_PINH1.2 84.21,66.97 84.21,66.83 85.52,66.83 85.59,66.76 85.94,66.76 85.94,67.03 D7.2 86.01,67.17 86.49,67.17 87.32,68 90.79,68 91.65,67.14 | R1_PINH1.2 84.21,66.69 84.21,64.19 U3.2 84.21,64.06 84.21,62.88 84,62.67 82.55,62.67 75.83,55.95 | 91.65,67.14 92.03,66.76 126.87,66.76 130.4,63.23 130.4,62.67 131.02,62.67 TP16.TP 130.4,62.53 130.4,62.05 v130.05,61.7 | 76.45,27.15 76.45,52.84 75.83,53.46 75.83,55.95
  Top 0.3: v118.97,29.15 118.49,28.67 118.21,28.67 C1_BAT2.1 118.07,28.6 118.07,26.11 123.13,21.05 123.13,20.64 IC4.5 123.27,20.57 124.93,20.57 125.14,20.77 126.17,20.77 C3.+ 126.38,20.77 127.35,20.77 128.46,19.67 129.84,19.67 130.71,18.8 J3.2 | R_CHANGE.2 60.87,107.68 60.87,107.2 62.52,105.55 v62.9,105.55 | 91.65,67.14 91.76,67.24 91.76,93.63 79.78,105.6 v74.35,105.6 | C9.1 7.45,99 v7.35,98.9 | 45.7,106.6 46.35,106.6 v47.35,105.6 | R_CHANGE.2 v57.65,107.85 | 27.95,43.7 28.15,43.5 v28.15,39 | v28.1,29.55 28.1,31.11 28.15,31.16
  Bottom 0.3: v118.97,29.15 118.97,50.62 v130.05,61.7 | v7.35,98.9 7.35,93.95 v7.7,93.6 | v57.65,107.85 56.25,107.85 53.25,104.85 48.1,104.85 v47.35,105.6 | v28.15,39 28.15,29.6 v28.1,29.55 | v62.9,105.55 74.3,105.55 v74.35,105.6
32KHZ  (via drill 0.3, 0.35)
  Top 0.15: v82.89,69.11 82.89,68.35 R2_PINH1.1 | v85.25,65.58 85.45,65.37 85.45,64.19 U3.1 | U2.9 17.95,46.58 v17.95,44.9
  Bottom 0.15: v82.89,69.11 82.89,67.93 84.16,66.66 | v85.25,65.58 84.16,66.66 | v17.95,44.9 26.1,36.75 26.1,30.5 27.6,29 37.3,29 52.45,44.15 52.45,53 47.7,57.75 47.7,63.3 51.06,66.66 84.16,66.66
DN  (via drill 0.3)
  Top 0.15: J2.A7 163.43,54.57 162.74,54.57 162.67,54.5 162.67,53.81 162.94,53.53 163.43,53.53 J2.B7 163.5,53.53 164.4,53.53 v164.47,53.46 | v157.75,48.75 156.71,48.75 D1.1
  Bottom 0.15: v157.75,48.75 159.41,50.41 161.21,50.41 164.26,53.46 v164.47,53.46
DP  (via drill 0.3)
  Top 0.15: 164.33,54.08 163.5,54.08 J2.A6 | 164.33,54.08 164.47,54.22 164.47,54.91 164.33,55.05 163.5,55.05 J2.B6 | v157.82,50.69 156.71,50.69 D1.3 | v164.47,54.08 164.33,54.08
  Bottom 0.15: v157.82,50.69 161.08,50.69 v164.47,54.08
EPD_3V3
  Top 0.3: J1.16 83.38,14.06 83.79,14.06 83.86,14.13 83.93,14.06 J1.15 83.93,14.27 83.79,14.4 83.79,14.47 83.86,14.54 83.86,15.17 84.83,16.14 84.83,20.22 84.97,20.22 EPD_C5.1 85.11,20.22 85.66,20.22 86.01,20.57 86.01,22.64 80.57,28.08 | TP17.TP 64.75,31.37 65.51,31.37 71.12,25.76 74.44,25.76 74.86,26.18 75.34,26.18 Q2.2 75.48,26.18 79.71,26.18 79.71,26.04 C7.1 79.71,26.32 79.71,27.21 80.57,28.08 | 80.57,28.08 83.24,30.75 83.24,32.76 83.52,32.76 L1.2
EPD_3V3_C  (via drill 0.3)
  Top 0.3: Q2.1 75.41,28.05 74.65,28.05 74.51,27.91 73.96,27.91 R_CL1.1 73.89,28.05 73.89,28.32 68.49,33.73 67.59,33.73 TP13.TP 67.45,33.73 66.83,33.73 66.76,33.79 66.76,34 45.01,55.75 41.55,55.75 v41.48,55.68 | v39.06,58.1 38.92,58.1 38.23,58.79 25,58.79 20.36,63.43 U2.18
  Bottom 0.3: v41.48,55.68 v39.06,58.1
EPD_BUSY  (via drill 0.35)
  Top 0.15: TP9.TP 95.96,2.54 v95,3.5 | J1.9 86.86,12.01 v86.85,12 | v86,10.53 85.48,10.53 85.3,10.35 75.86,10.35 75.65,10.14 75.65,9.9 73.95,8.2 73.75,8 71.2,5.45 44.9,5.45 v4.35,46 | U2.26 10.21,62.29 v10.25,62.25
  Bottom 0.15: 88.32,10.53 v86.85,12 | v95,3.5 95,9.7 94.34,10.35 88.5,10.35 88.32,10.53 | v86,10.53 88.32,10.53 | v10.25,62.25 4.35,56.35 v4.35,46
EPD_CS  (via drill 0.3)
  Top 0.15: v85.39,14.82 85.39,14.06 J1.12 | v75.14,22.44 74.86,22.71 74.86,23.34 74.58,23.34 D6.2 | R9.1 72.71,27.91 v71.88,27.91 71.67,27.91 68.56,31.02 68.42,31.02 68.35,31.09 68.35,31.37 68.28,31.44 67.59,31.44 TP10.TP 67.52,31.44 66.89,31.44 65.58,32.76 61.15,32.76 49.58,44.32 v49.58,44.53 | v21.4,44.87 20.36,45.91 20.36,46.67 U2.11
  Bottom 0.15: v85.39,14.82 85.39,19.07 82.02,22.44 v75.14,22.44 75.14,24.65 v71.88,27.91 | v21.4,44.87 21.74,44.53 v49.58,44.53
EPD_DC  (via drill 0.35)
  Top 0.15: TP11.TP 94.55,8.91 94.55,10.14 94.34,10.35 86.86,10.35 85.86,11.35 | J1.11 85.86,11.35 | v12.75,44.35 U2.5 | 85.86,11.35 85.32,10.8 v85.1,10.8
  Bottom 0.15: v12.75,44.35 12.75,35.25 43.2,4.8 72.95,4.8 75.65,7.5 75.65,10.14 76.3,10.8 v85.1,10.8
EPD_RST  (via drill 0.35)
  Top 0.15: TP12.TP 96.92,4.92 97.55,5.55 97.55,7.61 94.53,10.63 87.08,10.63 86.36,11.35 86.36,11.61 | J1.10 86.36,11.61 | 86.36,11.61 v86.35,11.6 | v16.6,62.2 16.6,64.16 U2.21
  Bottom 0.15: v86.35,11.6 76.4,11.6 70.95,6.15 44.95,6.15 24.3,26.8 24.3,37.7 15.85,46.15 15.85,61.45 v16.6,62.2
FLASH_CS  (via drill 0.3)
  Top 0.15: R5.1 31.51,44.46 31.86,44.46 31.86,44.67 32.2,45.01 32.2,45.15 32.34,45.29 32.34,45.5 32.55,45.7 33.1,45.7 33.17,45.77 33.17,45.98 D9.2 33.17,46.05 v33.17,46.88 | 26.9,53.15 21.61,47.85 21.61,46.74 U2.12 | 26.9,53.15 31.3,57.55 32.13,57.55 U1.1 | 26.9,53.15 v27.01,53.05
  Bottom 0.15: v27.01,53.05 v33.17,46.88
GDR  (via drill 0.3)
  Top 0.15: v90.37,13.23 J1.2 | v72.78,13.16 72.57,12.95 72.09,12.95 72.09,12.81 R4.2 72.09,12.74 72.09,12.05 71.88,11.84 68.14,11.84 67.66,12.33 67.66,13.02 Q3.1
  Bottom 0.15: v90.37,13.23 90.3,13.16 v72.78,13.16
GND  (via drill 0.35)  (2 unrouted)
  Top 0.15: U2.29_5 13.43,53.95 14.61,53.95 U2.29_8
  Top 0.152: J1.MP2 77.15,11.5 74.05,14.6 | 74.05,14.6 72.6,14.6 R4.1 | J1.17 82.86,15.89 v82.85,15.9 | v74.55,15.05 74.1,14.6 74.05,14.6 | EPD_C5.2 83.77,21.53 EPD_C6.2
  Bottom 0.152: v82.85,15.9 76.2,15.9 75.15,14.85 74.75,14.85 v74.55,15.05
  pour Top: 76.01,11.01 76.03,11.03 94.12,11.03 94.14,11.01 98.73,6.43 159.57,6.43 169.02,15.88 169.02,60.67 167.77,61.92 94.23,61.92 94.21,61.94 90.19,65.96 90.17,65.98 90.17,88.52 69.07,109.62 15.93,109.62 1.08,94.77 1.08,50.68 45.28,6.48 71.47,6.48
  pour Bottom: 76.01,10.96 76.03,10.98 94.02,10.98 94.04,10.96 98.58,6.43 159.57,6.43 169.02,15.88 169.02,60.57 167.67,61.92 94.23,61.92 94.21,61.94 90.19,65.96 90.17,65.98 90.17,88.52 68.92,109.77 16.23,109.57 1.03,94.37 1.03,51.08 45.68,6.43 71.47,6.43
GPIO8  (via drill 0.3)
  Top 0.15: v21.19,42.38 22.02,42.38 R1.1 | v19.11,45.57 19.11,46.67 U2.10
  Bottom 0.15: v21.19,42.38 21.19,43.49 v19.11,45.57
I2C_PW  (via drill 0.35)
  Top 0.15: C2.1 154.98,8.93 156.02,8.93 C1.1 | C1.1 156.09,8.93 157.13,8.93 R1_PINH.1 157.2,8.93 R2_PINH.1 | SENSOR2.6 155.4,12.81 156.02,12.81 156.37,12.46 156.37,9 C1.1
  Top 0.152: U2.17 21.64,62.81 25.25,59.2 49.15,59.2 v49.25,59.1 | C2.1 153.14,8.94 v152.6,8.4 | v151.5,5 110.45,5 99.5,15.95 99.5,33.8 v100.3,34.6
  Bottom 0.152: v49.25,59.1 64.2,59.1 82.6,40.7 94.85,40.7 100.3,35.25 v100.3,34.6 | v152.6,8.4 152.6,6.1 v151.5,5
INT_RTC  (via drill 0.35)
  Top 0.15: 82.89,65.95 82.89,65.3 82.96,65.23 82.96,64.19 U3.3 | 82.89,65.95 82.89,67.03 R1_PINH1.1 | 82.89,65.95 81.75,65.95 80.95,66.75 80.95,69.15 | 80.95,69.15 80.95,69.3 83.1,71.45 89.7,71.45 91.05,72.8 91.05,85.7 90.23,86.52 TP15.TP | 80.95,69.15 79.5,67.7 v75.55,67.7 | v65.4,67.55 28.6,67.55 v28.55,67.6 | U2.8 17.18,47.32 17.18,47.53 26.45,56.8 v28.55,56.8
  Bottom 0.15: v28.55,67.6 v28.55,56.8 | v65.4,67.55 65.55,67.7 v75.55,67.7
IO/BOOT  (via drill 0.3)
  Top 0.15: R_BOOT.1 20.01,108.65 20.71,108.65 21.33,109.28 22.23,109.28 BOOT_BUTTON.4 22.3,109.28 25.69,109.28 BOOT_BUTTON.3 25.76,109.28 26.32,109.28 26.94,108.65 | 26.94,108.65 27.63,108.65 C6.1 | v26.87,78.05 26.66,78.05 24.17,75.55 24.17,64.26 U2.15 | v26.87,108.65 26.94,108.65
  Bottom 0.15: v26.87,108.65 v26.87,78.05
IO/CHANGE  (via drill 0.3)
  Top 0.15: C10.1 66.06,109.14 65.93,109.28 65.79,109.28 CHANGE_BUTTON.3 65.72,109.28 62.26,109.28 CHANGE_BUTTON.4 62.19,109.28 61.98,109.28 61.84,109.14 60.87,109.14 R_CHANGE.1 60.8,109.14 v59.76,109.14 | v23.68,74.86 23.48,74.86 13.99,65.37 13.99,64.26 U2.23
  Bottom 0.15: v23.68,74.86 25.48,74.86 v59.76,109.14
MISO  (via drill 0.35)
  Top 0.15: R8.1 26.94,29.85 26.32,29.85 25.62,30.54 25.62,33.79 26.18,34.35 26.59,34.35 26.59,34.56 D12.2 18.3,34.58 7.02,45.86 7.02,48.8 9.25,51.03 v9.25,54.4 | U1.2 32.2,56.23 32.62,56.23 32.96,56.58 32.96,57.69 33.03,57.76 33.03,57.82 32.48,58.38 24.86,58.38 21.72,61.52 9.22,61.52 8.93,61.8 U2.27 | U2.27 8.94,65.81 v8.85,65.9 8.9,65.85 | v1.45,72.8 1.45,74.12 2.78,75.45 | U2.27 8.94,61.81 v10.65,60.1
  Top 0.152: TP6.TP 2.78,75.45 2.78,77.53 3.75,78.5 3.75,91.4 4.86,92.51 J4.P7
  Bottom 0.15: v8.85,65.9 1.95,72.8 v1.45,72.8 | v10.65,60.1 10.65,55.8 v9.25,54.4
MOSI  (via drill 0.35)  (1 unrouted)
  Top 0.15: R7.1 29.85,29.92 31.09,29.92 31.86,30.68 33.17,30.68 33.31,30.82 33.31,31.72 33.24,31.79 33.31,31.86 33.17,31.99 32.27,31.99 30.68,33.59 30.68,34.07 30.26,34.49 29.78,34.49 29.71,34.56 29.71,34.76 D11.2 29.72,35.92 | 43.77,49.72 40.16,53.32 40.16,53.74 40.03,53.74 U1.5 | 43.77,49.72 74.31,19.18 74.31,18 80.75,11.56 82.61,11.56 84.35,13.3 84.35,13.99 J1.14 | U2.7 15.3,46.69 v15.3,45.05 | TP7.TP 5.05,74.2 v1.7,70.85 | 29.72,35.92 36.45,42.65 v36.45,48.85 | v42.35,48.8 42.85,48.8 43.77,49.72 | 29.72,35.92 23.68,35.92 v22.9,36.7
  Top 0.152: J4.P3 4.15,86.33 4.15,76.05 TP7.TP
  Bottom 0.15: v1.7,70.85 1.7,47 3.7,45 15.25,45 v15.3,45.05 15.5,45.25 16.05,45.25 22.9,38.4 v22.9,36.7 | v36.45,48.85 42.3,48.85 v42.35,48.8
  other vias: 69.2,22.1
N$1  (via drill 0.3)
  Top 0.15: v164.47,52.84 164.26,53.05 163.5,53.05 J2.A5 | R2-USB1.2 155.95,47.09 155.95,47.37 156.3,47.37 156.37,47.3 157.41,47.3 159.88,49.77 v159.99,49.77
  Bottom 0.15: v164.47,52.84 164.05,52.84 161.35,50.14 160.35,50.14 v159.99,49.77
N$2  (via drill 0.35)
  Top 0.15: 164.78,58 v160.45,58 | 159.24,49.63 160.5,50.89 v160.5,52.7
  Top 0.152: J2.B5 164.45,56.05 165.29,56.89 165.29,57.49 164.78,58 | 159.24,49.63 157.33,47.72 155.58,47.72 155.42,47.56 155.42,46.44 155.96,45.9 R2-USB.1
  Bottom 0.15: v160.5,52.7 160.5,57.95 v160.45,58
N$3
  Top 0.15: SENSOR2.8 155.4,14.4 156.37,14.4 157.2,13.57 158.24,13.57 SENSOR2.2
N$4
  Top 0.15: J1.18 82.34,14.06 82.34,18.49 83.52,19.67 83.52,20.22 83.72,20.22 EPD_C6.1
N$5  (via drill 0.3)
  Top 0.15: C1_BAT1.1 119.11,18.35 119.59,18.35 119.94,18.7 120.43,18.7 IC4.3 120.5,18.7 121.19,18.7 121.47,18.97 121.47,20.08 | 121.47,20.08 121.47,20.36 121.26,20.57 120.5,20.57 IC4.1 | Q1.2 129.91,26.11 129.91,25 129.71,24.79 129.71,20.98 129.77,20.91 129.77,20.5 129.5,20.5 D2.1 129.43,20.5 v128.39,20.5 | v121.53,20.08 121.47,20.08
  Bottom 0.15: v121.53,20.08 127.97,20.08 v128.39,20.5
N$6
  Top 0.15: J1.19 81.85,14.06 81.85,19.32 82.2,19.67 82.2,20.22 82.41,20.22 EPD_C7.1
N$7
  Top 0.15: J1.20 81.37,14.06 81.37,20.22 81.23,20.22 EPD_C8.1
N$8
  Top 0.15: C4.1 91.2,32.62 90.37,32.62 90.3,32.69 89.75,32.69 D3.2 89.68,32.69 89.33,32.69 89.33,31.37 87.05,29.09 86.36,29.09 D4.1
N$10
  Top 0.15: J1.22 80.33,14.06 80.33,17.63 78.74,19.22 78.74,20.22 78.6,20.22 EPD_C10.1
N$12  (via drill 0.3)
  Top 0.15: v78.74,14.2 79.15,14.2 79.22,14.27 79.36,14.27 79.36,14.06 J1.24 | v77.49,14.2 77.49,14.4 75.21,16.69 72.5,16.69 71.81,17.38 71.53,17.38 EPD_C12.1
  Bottom 0.15: v77.49,14.2 v78.74,14.2
N$14
  Top 0.15: C_DELAY.1 50.83,101.31 50.34,101.31 49.86,101.8 49.51,101.8 IC1.5
N$16  (via drill 0.3)
  Top 0.15: v117.38,29.29 117.45,29.36 117.45,29.5 117.24,29.71 116.83,29.71 116.75,29.78 116.75,29.98 R1_BAT.2 | v123.96,29.15 123.89,29.09 123.89,29.02 124.03,28.88 124.03,28.25 124.1,28.18 125,28.18 MCP73831.1
  Bottom 0.15: v117.38,29.29 118.21,29.29 118.83,28.67 123.47,28.67 v123.96,29.15
N$17
  Top 0.15: CHG_LED.C 119.46,29.98 118.14,29.98 118.07,29.92 118,29.98 R1_BAT.1
N$18
  Top 0.15: R2_BAT.2 121.67,26.38 122.02,26.38 122.02,26.66 121.95,26.73 121.95,27.7 122.02,27.77 122.02,28.18 122.36,28.18 MCP73831.5
N$21
  Top 0.15: R_CAPACITOR.1 88.78,56.23 88.43,56.23 88.43,56.51 88.5,56.58 88.5,65.44 88.02,65.93 D7.1
N$22
  Top 0.15: J1.4 89.33,14.06 89.33,19.46 89.61,19.74 89.61,20.22 89.82,20.22 EPD_C1.1
N$23
  Top 0.15: J1.5 88.85,14.06 88.85,20.22 88.71,20.22 EPD_C2.1
PREVGH  (via drill 0.35)
  Top 0.15: J1.21 80.88,14.06 80.88,18.84 80.46,19.26 80.05,19.67 80.05,20.22 79.84,20.22 EPD_C9.1
  Top 0.152: D5.1 77.7,35.31 v77.7,28.55 | v77.6,23.05 77.6,19.55 v79.1,18.05 | v80.1,18.5 80.46,18.86 80.46,19.26
  Bottom 0.152: v77.7,28.55 77.7,23.15 v77.6,23.05 | v79.1,18.05 79.55,18.5 v80.1,18.5
PREVGL  (via drill 0.3, 0.35)
  Top 0.15: v75.55,17.38 75.55,17.17 77.97,14.75 79.78,14.75 79.84,14.68 79.84,14.06 J1.23 79.86,13.39 v81.1,12.15 | v74.17,17.38 73.13,17.38 EPD_C11.1 | D4.2 95.85,23.03 v95.85,13.05
  Bottom 0.15: v74.17,17.38 v75.55,17.38 | v81.1,12.15 85.85,12.15 86.2,12.5 88.6,12.5 89,12.1 94.9,12.1 v95.85,13.05
RESE  (via drill 0.3)
  Top 0.15: v89.26,12.67 89.89,13.3 89.89,13.99 J1.3 | v71.19,8.17 70.15,8.17 R3.2 70.08,8.17 69.87,8.17 69.87,9.07 67.03,11.91 67.03,13.71 67.24,13.92 68.77,13.92 68.97,13.71 68.97,13.09 Q3.2
  Bottom 0.15: v89.26,12.67 89.06,12.88 76.99,12.88 72.28,8.17 v71.19,8.17
RESE'
  Top 0.15: R3.1 70.08,6.86 68.28,6.86 68.28,7.48 SJ1.2 68.28,7.55 68.28,8.31 68.21,8.38 68.21,9.21 R2.2
RESET  (via drill 0.3, 0.35)
  Top 0.15: C5.1 51.11,109.07 50.9,109.28 50.76,109.28 RESET_BUTTON.3 50.69,109.28 47.3,109.28 RESET_BUTTON.4 47.23,109.28 46.54,109.28 46.47,109.21 45.91,109.21 R_RESET.1 45.84,109.21 v45.08,109.21 | 16.9,68.7 16.8,68.7 | 16.8,68.7 10.32,68.7 6.72,65.09 6.72,61.73 v8.54,59.91 | 10.18,46.74 U2.3 10.21,52.49 9.7,53 v9.7,53.05 | v46.24,106 46.33,105.91 46.33,101.8 46.6,101.8 IC1.1 46.74,101.8 47.44,101.8 47.64,101.59 47.64,99.44 44.5,96.3 v43.7,96.3 | 16.8,68.7 40.65,92.55 v40.65,93.3
  Bottom 0.15: v45.08,109.21 46.24,108.05 v46.24,106 | v9.7,53.05 8.54,54.21 v8.54,59.91 | v43.7,96.3 40.7,93.3 v40.65,93.3
RTC_RST  (via drill 0.35)
  Top 0.15: U3.4 80.88,63.39 80.88,63.09 79.94,62.15 67.6,62.15 v65.4,64.35 | v58.2,64.35 29.6,64.35 27.5,62.25 23.2,62.25 22.91,62.54 U2.16
  Bottom 0.15: v65.4,64.35 v58.2,64.35
RX  (via drill 0.3)
  Top 0.15: v12.74,68.21 12.74,64.26 U2.24 | v12.4,69.18 12.67,69.18 12.88,69.39 12.88,70.08 13.43,70.08 TP2.TP
  Bottom 0.15: v12.74,68.21 12.74,68.83 v12.4,69.18
SCK  (via drill 0.3)
  Top 0.15: J1.13 84.83,13.99 84.83,13.02 82.45,10.64 75.75,10.64 70.84,5.73 54.45,5.73 32.62,27.56 TP8.TP 32.55,27.56 32.55,27.63 32.62,27.7 32.62,29.29 32.96,29.64 32.96,29.98 32.62,29.98 R6.1 33.03,29.98 33.24,29.98 33.59,30.33 33.59,34.07 33.24,34.42 32.62,34.42 32.62,34.69 D10.2 32.62,34.76 32.62,35.87 | 39.23,54.88 38.3,53.95 38.3,41.55 32.62,35.87 | 39.23,54.88 39.33,54.98 39.96,54.98 U1.6 | v21.33,44.25 21.19,44.11 15.6,44.11 13.99,45.72 13.99,46.67 U2.6 | v32.48,35.94 32.55,35.87 32.62,35.87 | v7.06,90.37 6.99,90.3 5.96,90.3 J4.P5 | 39.23,54.88 v39.13,54.98
  Bottom 0.15: v21.33,44.25 24.17,44.25 v32.48,35.94 | v7.06,90.37 7.06,82.9 21.91,68.05 28.74,68.05 29,67.79 29,65.11 v39.13,54.98
SCL  (via drill 0.3, 0.35)
  Top 0.15: v134.48,30.95 134.48,30.68 134.41,30.61 133.79,30.61 U4.7 | v157.2,11.98 158.24,11.98 SENSOR2.4 158.31,11.98 158.51,11.98 158.51,11.56 159.14,10.94 159.14,7.69 159.07,7.62 158.38,7.62 R2_PINH.2
  Top 0.152: 159.14,10.94 159.14,11.39 v159.3,11.55 | v164.55,14.2 166.85,16.5 166.85,20.15 166.2,20.8 J3.4 | U3.16 85.47,53.42 v85.45,53.4 | v117.7,44.8 v121.5,44.8 | v87.75,50.6 87.4,50.25 v85.7,50.25 | v67.6,58.85 59.95,66.5 v26.85,66.5 | v17.85,66.5 17.85,64.22 U2.20
  Bottom 0.15: v134.48,30.95 138.22,30.95 v157.2,11.98
  Bottom 0.152: v159.3,11.55 161.95,14.2 v164.55,14.2 | v117.7,44.8 94.05,44.8 87.75,51.1 | 87.75,51.1 v85.45,53.4 | v134.48,30.95 121.5,43.94 v121.5,44.8 | 87.75,51.1 v87.75,50.6 | v85.7,50.25 76.2,50.25 v67.6,58.85 | v26.85,66.5 v17.85,66.5
SDA  (via drill 0.3, 0.35)
  Top 0.15: v134.97,31.44 134.34,31.44 134.07,31.16 133.79,31.16 U4.8 | v157.2,12.81 158.24,12.81 SENSOR2.3 158.31,12.81 159.07,12.81 159.41,12.46 159.86,12.46 | 159.86,12.46 159.86,7.86 158.93,6.92 157.54,6.92 157.47,6.99 157.47,7.55 157.41,7.62 157.2,7.62 R1_PINH.2 | 159.86,12.46 161.63,12.46 166.48,17.31 166.48,19.46 166.14,19.8 J3.3
  Top 0.152: U3.15 84.3,54.75 v84.3,53.4 | v117.75,44 122.41,44 v134.97,31.44 | v27.25,65.85 58.95,65.85 v66.55,58.25 | v19.1,65.9 U2.19
  Bottom 0.15: v134.97,31.44 135.18,31.23 138.36,31.23 156.78,12.81 v157.2,12.81
  Bottom 0.152: v84.3,53.4 87.95,49.75 | 87.95,49.75 93.7,44 v117.75,44 | v19.1,65.9 27.2,65.9 v27.25,65.85 | v66.55,58.25 75.05,49.75 87.95,49.75
SRC  (via drill 0.3)
  Top 0.15: C4.2 91.2,33.93 87.39,33.93 84.21,37.12 83.1,37.12 D5.2 82.96,37.12 81.85,37.12 79.43,34.69 79.43,32.76 L1.1 v78.13,32.76 | v68.28,24.58 68.28,15.17 Q3.3
  Bottom 0.15: v68.28,24.58 68.28,24.93 76.11,32.76 v78.13,32.76
SS_SD  (via drill 0.35)
  Top 0.15: D8.2 12.12,97.16 11.36,97.16 10.87,97.64 10.11,97.64 R10.1 10.06,96.21 v10.05,96.2 | v9.65,91.8 9.65,89.96 6.7,87.01
  Top 0.152: v11.5,44.5 11.5,46.68 U2.4 | 6.73,87.01 6.7,87.01 J4.P2 5.78,86.46 5.09,86.46 4.65,86.02 4.65,77.25 6.25,75.65 6.25,74.65 5.55,73.94 5.54,73.94 v0.65,69.05
  Bottom 0.15: v10.05,96.2 10.05,92.2 v9.65,91.8
  Bottom 0.152: v11.5,44.5 7.6,40.6 4.95,40.6 0.35,45.2 0.35,66.8 0.65,67.1 v0.65,69.05
TX  (via drill 0.3)
  Top 0.15: v11.29,68.21 11.49,68 11.49,64.26 U2.25 | v10.32,69.18 10.6,69.46 10.6,70.15 11.22,70.15 TP1.TP
  Bottom 0.15: v10.32,69.18 v11.29,68.21
USB_D+  (via drill 0.35)
  Top 0.152: U2.14 24.18,45.72 24.55,45.35 28.45,45.35 29.5,46.4 v29.5,51.95 | D1.4 152.7,52.13 v152.7,52.55 | v148.3,62.65 144.8,66.15 v137.2,66.15 | v60.2,63.05 29.85,63.05 v29.65,62.85
  Bottom 0.152: v148.3,62.65 152.7,58.25 v152.7,52.55 | v29.5,51.95 29.65,52.1 v29.65,62.85 | v60.2,63.05 128.41,63.05 128.43,63.08 134.13,63.08 v137.2,66.15
USB_D-  (via drill 0.35)
  Top 0.152: U2.13 22.91,45.14 23.03,45.02 28.72,45.02 29.95,46.25 29.95,55.15 v30.15,55.35 | D1.6 152.62,48.78 v152.6,48.8 | v146.8,62.6 144.75,64.65 v137.2,64.65 | v60.35,61.7 30.75,61.7 v30.15,61.1
  Bottom 0.152: v30.15,55.35 v30.15,61.1 | v60.35,61.7 127.45,61.7 128.55,62.8 135.75,62.8 137.2,64.25 v137.2,64.65 | v146.8,62.6 152.2,57.2 152.2,50.95 152.6,50.55 v152.6,48.8
VBAT
  Top 0.3: U4.3 131.78,30.19 131.78,30.54 131.85,30.61 131.78,30.68 U4.2 131.64,30.61 130.33,30.61 129.08,29.36 128.94,29.29 | 128.94,29.29 128.94,28.32 Q1.3 | 128.94,29.29 127.83,30.4 126.87,30.4 C2_BAT.1 126.73,30.4 126.1,30.4 125.83,30.12 125.07,30.12 MCP73831.3 124.86,30.12 124.65,30.12 124.65,35.39 122.5,37.53 122.5,38.23 121.95,38.23 TP3.TP
VBUS  (via drill 0.35)
  Top 0.3: C5-USB.1 158.58,52.08 158.58,50.69 157.61,49.72 156.71,49.72 D1.2 156.5,49.72 155.74,49.72 155.4,49.38 155.4,48.54 154.91,48.06 152.84,48.06 152.77,48.13 152.56,48.13 152.45,48.02 | 152.45,48.02 152.56,47.92 152.56,43.84 152.63,43.77 152.63,42.66 PFMF.050.1.2 152.63,42.45 152.63,42.38 150.3,42.38 | 152.45,48.02 152.35,48.13 151.73,48.13 C4-USB.1 | 150.3,42.38 146.6,42.38 TP14.TP 146.39,42.38 145.98,42.38 145.98,41.69 | Q1.1 127.97,26.87 127.8,27.04 127.04,27.8 v127,27.8 | R1-PWRUSB.2 115.72,19.25 115.72,20.43 C1_BAT.1 115.79,20.57 116.2,20.57 116.96,21.33 | 116.96,21.33 121.05,21.33 122.5,19.88 123.68,19.88 124.23,19.32 127.56,19.32 128.46,18.42 129.43,18.42 D2.2 | 120.77,30.19 120.77,29.98 120.91,29.98 CHG_LED.A 121.05,29.98 121.33,29.98 121.47,30.12 122.36,30.12 MCP73831.4 122.5,30.12 122.71,30.12 122.71,29.64 123.61,28.74 123.61,27.11 v123.6,27.1 | 116.96,21.33 117.55,21.92 v117.55,22.3 | 150.3,42.38 148.85,43.83 v148.85,44.35
  Bottom 0.3: v117.55,22.3 118.8,22.3 v123.6,27.1 126.3,27.1 v127,27.8 127,35.35 119.4,42.95 119.4,45.9 120.4,46.9 146.3,46.9 v148.85,44.35
VRTC
  Top 0.3: C10_SUPERCAP.1 91.69,54.91 88.85,54.91 R_CAPACITOR.2 88.64,54.91 87.71,54.91 85.67,52.87 83.1,52.87 C8.1 83.03,52.84 83.03,53.81 82.96,53.88 82.96,54.85 U3.14
VUSB
  Top 0.3: J2.A4 163.5,51.8 163.5,52.01 J2.B9 163.36,52.08 163.08,52.08 162.94,51.94 162.67,51.94 | J2.A9 163.5,56.78 163.5,56.58 J2.B4 163.36,56.58 163.01,56.58 162.94,56.65 162.67,56.65 162.25,56.23 162.25,52.35 162.67,51.94 | PFMF.050.1.1 157.13,42.66 157.13,43.77 161.06,47.7 161.06,50.33 162.67,51.94